# EAGLE board Professional 1.42 (EAGLE 7.7.0)
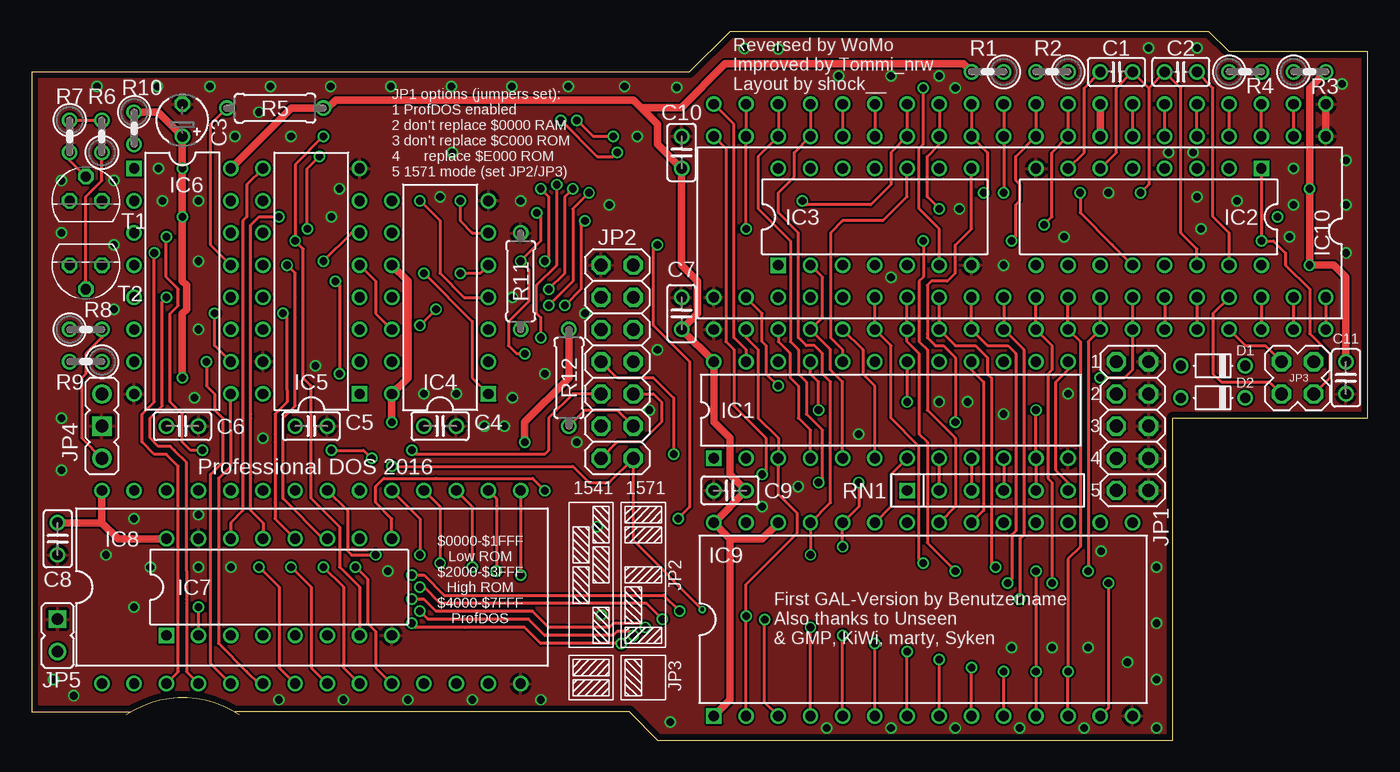
[diagram p0: board, top side]
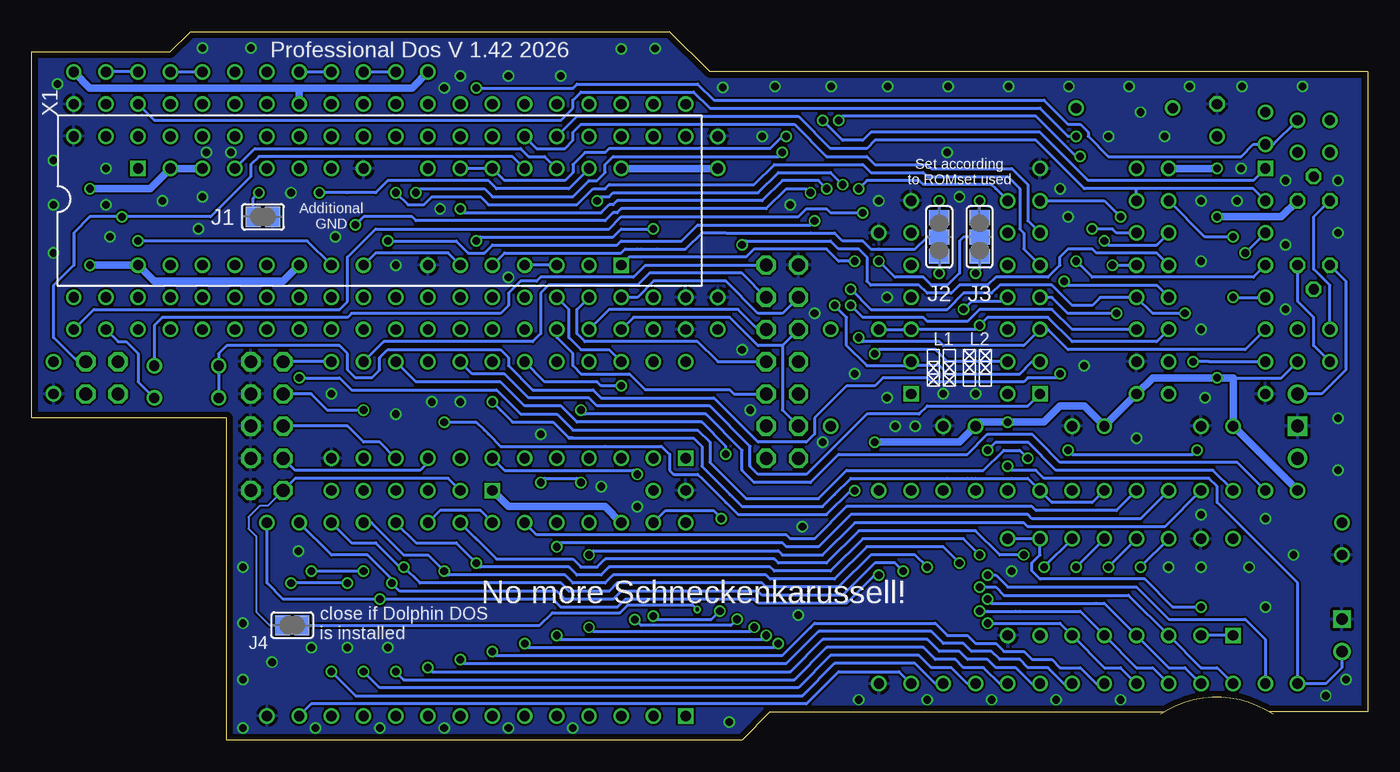
[diagram p1: board, bottom side, seen from below]

Size 105.37 x 55.88 mm. Coordinates in mm from the lower left corner, seen from the top.
Outline: 7.47,2.02 arc-68 16.36,2.02
Outline: 7.78,2.22 0,2.22 0,52.7 51.89,52.7 55.07,55.88 92.85,55.88 94.44,54.29 105.37,54.29 105.37,25.4 89.99,25.4 89.99,0 49.35,0 47.13,2.22 16.04,2.22
Copper layers (1*16): Top 0.035mm / dielectric 1.5mm / Bottom 0.035mm
Design rules "default *": minimum track width 6mil, minimum drill 0.3mm, track to track 6mil, track to pad 6mil, pad to pad 6mil, via to via 6mil, smd to smd 6mil, copper to edge 0.5mm, drill to drill 6mil, minimum pad ring 6mil, minimum via ring 6mil, stop-mask expansion 0.00126875mm, vias tented up to drill 0.31mm, thermal gap 10mil

## Footprints (pad centres in the part's own frame; a part is rotated, then mirrored left to right if it is on the bottom)
C025-025X050 = drill 0.813: 1 -1.27,0; 2 1.27,0
TT2D4 = drill 0.813: + -1.27,0 | drill 0.813 octagon: - 1.27,0
C2.5-2 = drill 0.813: 1 -1.27,0; 2 1.27,0
D-5 = drill 0.813: A 2.54,0; C -2.54,0
DIL24-3 = drill 0.813 square: 1 -13.97,-3.81 | drill 0.813: 2 -11.43,-3.81; 3 -8.89,-3.81; 4 -6.35,-3.81; 5 -3.81,-3.81; 6 -1.27,-3.81; 7 1.27,-3.81; 8 3.81,-3.81; 9 6.35,-3.81; 10 8.89,-3.81; 11 11.43,-3.81; 12 13.97,-3.81; 13 13.97,3.81; 14 11.43,3.81; 15 8.89,3.81; 16 6.35,3.81; 17 3.81,3.81; 18 1.27,3.81; 19 -1.27,3.81; 20 -3.81,3.81; 21 -6.35,3.81; 22 -8.89,3.81; 23 -11.43,3.81; 24 -13.97,3.81
DIL16 = drill 0.813 square: 1 -8.89,-3.81 | drill 0.813: 2 -6.35,-3.81; 3 -3.81,-3.81; 4 -1.27,-3.81; 5 1.27,-3.81; 6 3.81,-3.81; 7 6.35,-3.81; 8 8.89,-3.81; 9 8.89,3.81; 10 6.35,3.81; 11 3.81,3.81; 12 1.27,3.81; 13 -1.27,3.81; 14 -3.81,3.81; 15 -6.35,3.81; 16 -8.89,3.81
DIL14 = drill 0.813 square: 1 -7.62,-3.81 | drill 0.813: 2 -5.08,-3.81; 3 -2.54,-3.81; 4 0,-3.81; 5 2.54,-3.81; 6 5.08,-3.81; 7 7.62,-3.81; 8 7.62,3.81; 9 5.08,3.81; 10 2.54,3.81; 11 0,3.81; 12 -2.54,3.81; 13 -5.08,3.81; 14 -7.62,3.81
DIL28-6 = drill 0.813: 1 -16.51,-7.62; 2 -13.97,-7.62; 3 -11.43,-7.62; 4 -8.89,-7.62; 5 -6.35,-7.62; 6 -3.81,-7.62; 7 -1.27,-7.62; 8 1.27,-7.62; 9 3.81,-7.62; 10 6.35,-7.62; 11 8.89,-7.62; 12 11.43,-7.62; 13 13.97,-7.62; 14 16.51,-7.62; 15 16.51,7.62; 16 13.97,7.62; 17 11.43,7.62; 18 8.89,7.62; 19 6.35,7.62; 20 3.81,7.62; 21 1.27,7.62; 22 -1.27,7.62; 23 -3.81,7.62; 24 -6.35,7.62; 25 -8.89,7.62; 26 -11.43,7.62; 27 -13.97,7.62; 28 -16.51,7.62
DIL28-6' = drill 0.813 square: 1 -16.51,-7.62 | drill 0.813: 2 -13.97,-7.62; 3 -11.43,-7.62; 4 -8.89,-7.62; 5 -6.35,-7.62; 6 -3.81,-7.62; 7 -1.27,-7.62; 8 1.27,-7.62; 9 3.81,-7.62; 10 6.35,-7.62; 11 8.89,-7.62; 12 11.43,-7.62; 13 13.97,-7.62; 14 16.51,-7.62; 15 16.51,7.62; 16 13.97,7.62; 17 11.43,7.62; 18 8.89,7.62; 19 6.35,7.62; 20 3.81,7.62; 21 1.27,7.62; 22 -1.27,7.62; 23 -3.81,7.62; 24 -6.35,7.62; 25 -8.89,7.62; 26 -11.43,7.62; 27 -13.97,7.62; 28 -16.51,7.62
DIL40 = drill 0.813: 1 -24.13,-7.62; 2 -21.59,-7.62; 3 -19.05,-7.62; 4 -16.51,-7.62; 5 -13.97,-7.62; 6 -11.43,-7.62; 7 -8.89,-7.62; 8 -6.35,-7.62; 9 -3.81,-7.62; 10 -1.27,-7.62; 11 1.27,-7.62; 12 3.81,-7.62; 13 6.35,-7.62; 14 8.89,-7.62; 15 11.43,-7.62; 16 13.97,-7.62; 17 16.51,-7.62; 18 19.05,-7.62; 19 21.59,-7.62; 20 24.13,-7.62; 21 24.13,7.62; 22 21.59,7.62; 23 19.05,7.62; 24 16.51,7.62; 25 13.97,7.62; 26 11.43,7.62; 27 8.89,7.62; 28 6.35,7.62; 29 3.81,7.62; 30 1.27,7.62; 31 -1.27,7.62; 32 -3.81,7.62; 33 -6.35,7.62; 34 -8.89,7.62; 35 -11.43,7.62; 36 -13.97,7.62; 37 -16.51,7.62; 38 -19.05,7.62; 39 -21.59,7.62; 40 -24.13,7.62
SJ = smd 1.168 x 1.6: 1 -0.762,0; 2 0.762,0
SJ_2 = smd 1.168 x 1.6: 1 -1.524,0; 2 0,0; 3 1.524,0
2X05 = drill 1.016 octagon: 1 -5.08,-1.27; 2 -5.08,1.27; 3 -2.54,-1.27; 4 -2.54,1.27; 5 0,-1.27; 6 0,1.27; 7 2.54,-1.27; 8 2.54,1.27; 9 5.08,-1.27; 10 5.08,1.27
2X07 = drill 1.016 octagon: 1 -7.62,-1.27; 2 -7.62,1.27; 3 -5.08,-1.27; 4 -5.08,1.27; 5 -2.54,-1.27; 6 -2.54,1.27; 7 0,-1.27; 8 0,1.27; 9 2.54,-1.27; 10 2.54,1.27; 11 5.08,-1.27; 12 5.08,1.27; 13 7.62,-1.27; 14 7.62,1.27
2X02 = drill 1.016 octagon: 1 -1.27,-1.27; 2 -1.27,1.27; 3 1.27,-1.27; 4 1.27,1.27
1X03 = drill 1.016: 1 -2.54,0; 3 2.54,0 | drill 1.016 square: 2 0,0
JP1 = drill 0.914 square: 1 0,-1.27 | drill 0.914: 2 0,1.27
0207/2V = drill 0.813: 1 -1.27,0; 2 1.27,0
0207/7 = drill 0.813: 1 -3.81,0; 2 3.81,0
RN-6 = drill 0.813 square: 1 -6.35,0 | drill 0.813: 2 -3.81,0; 3 -1.27,0; 4 1.27,0; 5 3.81,0; 6 6.35,0
TO92 = drill 0.813 octagon: 1 1.27,0; 2 0,1.905; 3 -1.27,0
DIL40-BPLACE = drill 0.813: 1 -24.13,-7.62; 2 -21.59,-7.62; 3 -19.05,-7.62; 4 -16.51,-7.62; 5 -13.97,-7.62; 6 -11.43,-7.62; 7 -8.89,-7.62; 8 -6.35,-7.62; 9 -3.81,-7.62; 10 -1.27,-7.62; 11 1.27,-7.62; 12 3.81,-7.62; 13 6.35,-7.62; 14 8.89,-7.62; 15 11.43,-7.62; 16 13.97,-7.62; 17 16.51,-7.62; 18 19.05,-7.62; 19 21.59,-7.62; 20 24.13,-7.62; 21 24.13,7.62; 22 21.59,7.62; 23 19.05,7.62; 24 16.51,7.62; 25 13.97,7.62; 26 11.43,7.62; 27 8.89,7.62; 28 6.35,7.62; 29 3.81,7.62; 30 1.27,7.62; 31 -1.27,7.62; 32 -3.81,7.62; 33 -6.35,7.62; 34 -8.89,7.62; 35 -11.43,7.62; 36 -13.97,7.62; 37 -16.51,7.62; 38 -19.05,7.62; 39 -21.59,7.62; 40 -24.13,7.62

## Placement (x,y rotation side)
C1  56pF  [C025-025X050]  85.55,52.7 0 top
C2  56pF  [C025-025X050]  90.63,52.7 180 top
C3  10µF/16V  [TT2D4]  11.89,48.89 90 top
C4  100nf  [C2.5-2]  32.21,24.76 0 top
C5  100nf  [C2.5-2]  22.05,24.76 0 top
C6  100nf  [C2.5-2]  11.89,24.76 0 top
C7  100nf  [C2.5-2]  51.26,33.66 90 top
C8  100nf  [C2.5-2]  2.04,15.88 270 top
C9  100nf  [C2.5-2]  55.07,19.68 180 top
C10  100nf  [C2.5-2]  51.26,46.35 90 top
C11  100nf  [C2.5-2]  103.64,28.57 270 top
D1  1N4148  [D-5]  93.17,29.53 180 top
D2  1N4148  [D-5]  93.17,26.99 180 top
IC1  GAL 22V10  [DIL24-3]  67.77,26.04 0 top
IC2  74LS123N  [DIL16]  88.09,41.27 180 top
IC3  74LS00N  [DIL14]  66.5,41.27 0 top
IC4  74LS74N  [DIL14]  32.21,34.92 90 top
IC5  74LS157N  [DIL16]  22.05,36.2 90 top
IC6  74LS367N  [DIL16]  11.89,36.2 270 top
IC7  74LS173N  [DIL16]  19.51,12.06 0 top
IC8  EPROM  [DIL28-6]  22.05,12.06 0 top
IC9  SRAM  [DIL28-6']  70.31,9.53 0 top
IC10  CPU 6502  [DIL40]  77.93,40 180 top
J1  1  [SJ]  87.13,41.27 0 bottom
J2  Alternativ connection for old version  [SJ_2]  33.79,39.69 90 bottom
J3  Alternativ connection for old version  [SJ_2]  30.62,39.69 90 bottom
J4  1  [SJ]  84.82,9.06 180 bottom
JP1  Options  [2X05]  86.82,24.76 270 top
JP2  1  [2X07]  46.18,29.84 270 top
JP3  1  [2X02]  99.83,28.57 0 top
JP4  DUO LED 2V/20mA  [1X03]  5.54,24.76 270 top
JP5  ROMSW  [JP1]  2.04,8.26 180 top
R1  1K5  [0207/2V]  75.39,52.7 180 top
R2  9K1  [0207/2V]  80.47,52.7 180 top
R3  1K5  [0207/2V]  100.79,52.7 0 top
R4  9K1  [0207/2V]  95.71,52.7 0 top
R5  1K8  [0207/7]  19.19,49.85 0 top
R6  30k  [0207/2V]  5.54,47.62 90 top
R7  30k  [0207/2V]  3,47.62 270 top
R8  300  [0207/2V]  4.27,32.38 0 top
R9  300  [0207/2V]  4.27,29.84 180 top
R10  4k7  [0207/2V]  8.08,48.26 270 top
R11  1K8  [0207/7]  38.56,36.2 270 top
R12  4k7  [0207/7]  42.37,28.57 90 top
RN1  4k7  [RN-6]  75.39,19.68 0 top
T1  BC557  [TO92]  4.27,42.55 0 top
T2  BC547  [TO92]  4.27,37.46 180 top
X1  DIL40-Adaptor  [DIL40-BPLACE]  77.93,42.55 180 top

## Library data of the parts
C1-C3 R1-R12 = rcl
C4-C11 = capacitor-wima
D1 D2 = diode
IC1 = pal; MPN: GAL22V10D-7LPN; OC_FARNELL: 1571925; OC_NEWARK: 97M0480
IC2-IC7 = 74xx-eu
IC8 = microchip; OC_FARNELL: unknown; OC_NEWARK: unknown
IC9 = memory-hitachi; OC_FARNELL: 283605; OC_NEWARK: unknown
IC10 X1 = csg65xxx
J1-J4 JP5 = jumper
JP1 JP3 JP4 = pinhead
JP2 = pinhead_eckig
RN1 = resistor-net
T1 T2 = transistor

## Nets
2MHZ(D1): D1.C JP2.2
2MHZ/A13-EXT: IC1.14 JP2.4
/EN-A[4..7]->AH: IC1.20 IC3.9 IC3.10 IC6.1
/IRQ: IC10.4 X1.4
/NMI: IC10.6 X1.6
/Q: IC4.6 J2.3
/RES: IC4.13 IC10.40 J3.2 X1.40
A0: IC5.14 IC10.9 X1.9
A1: IC4.2 IC5.2 IC10.10 X1.10
A2: IC4.12 IC5.5 IC10.11 X1.11
A3: IC5.11 IC10.12 X1.12
A4: IC5.13 IC6.10 IC10.13 X1.13
A5: IC5.3 IC6.6 IC10.14 X1.14
A6: IC5.6 IC6.4 IC10.15 X1.15
A7: IC5.10 IC6.2 IC10.16 X1.16
A8: IC8.25 IC9.25 IC10.17 X1.17
A9: IC8.24 IC9.24 IC10.18 X1.18
A10: IC8.21 IC9.21 IC10.19 X1.19
A11: IC1.7 IC8.23 IC9.23 IC10.20
A11-EXT: IC1.23 X1.20
A12: IC1.3 IC8.2 IC9.2 IC10.22
A12-EXT: IC1.19 X1.22
A13: IC1.4 IC10.23 JP2.5 JP2.11
A13-EXT: JP2.3 X1.23
A14: IC1.5 IC3.2 IC10.24 JP2.6
A14-EXT: JP2.8 X1.24
A15: IC1.6 IC10.25 JP2.10 JP2.13
A15-EXT: IC1.22 X1.25
AH4: IC6.9 IC7.6 IC8.6 IC9.6
AH5: IC6.7 IC7.5 IC8.5 IC9.5
AH6: IC6.5 IC7.4 IC8.4 IC9.4
AH7: IC6.3 IC7.3 IC8.3 IC9.3
AL0: IC5.12 IC7.11 IC8.10 IC9.10
AL1: IC5.4 IC7.12 IC8.9 IC9.9
AL2: IC5.7 IC7.13 IC8.8 IC9.8
AL3: IC5.9 IC7.14 IC8.7 IC9.7
CLR: IC4.1 J3.1
D0: IC8.11 IC9.11 IC10.33 X1.33
D1: IC8.12 IC9.12 IC10.32 X1.32
D2: IC8.13 IC9.13 IC10.31 X1.31
D3: IC8.15 IC9.15 IC10.30 X1.30
D4: IC8.16 IC9.16 IC10.29 X1.29
D5: IC8.17 IC9.17 IC10.28 X1.28
D6: IC8.18 IC9.18 IC10.27 X1.27
D7: IC8.19 IC9.19 IC10.26 X1.26
EN-2MHZ: IC2.9 IC3.6 R6.2 R7.1 R10.2
EN-A[4..7]->AH: IC3.8 IC7.1 IC7.2 IC7.9 IC7.10
EPROM_A13: IC8.26 JP2.9
EPROM_A13/A14-EXT: IC1.15 JP2.7
EPROM_A14: IC1.21 IC8.27
EPROM_A15: IC8.1 J4.1 JP2.14 JP5.2
FETCH_CLOCK_MODE: D1.A D2.A IC6.12
GND: C3.- C4.2 C5.2 C6.2 C7.2 C8.2 C9.2 C10.2 C11.2 IC1.12 IC2.8 IC3.7 IC4.7 IC5.8 IC5.15 IC6.8 IC7.8 IC7.15 IC8.14 IC9.14 IC10.1 IC10.21 J1.2 JP1.2 JP1.4 JP1.6 JP1.8 JP1.10 JP2.1 JP4.2 JP5.1 R11.1 X1.1 X1.21
N$1: R3.1 R4.2
N$2: C1.2 C2.2 IC2.6 IC2.14 J1.1
N$3: C2.1 IC2.15 R4.1
N$4: C1.1 IC2.7 R2.1
N$5: R1.1 R2.2
N$6: IC2.4 IC3.12
N$7: R7.2 T1.2
N$8: IC2.12 IC3.13
N$9: IC3.5 J2.2
N$10: R6.1 T2.2
N$11: IC3.3 IC3.4
N$12: IC3.1 IC4.8
N$13: JP4.1 T2.1
N$14: R9.2 T2.3
N$21: JP4.3 R8.2
N$22: R8.1 T1.3
NC0: IC10.5 X1.5
NC1: IC10.35 X1.35
NC2: IC10.36 X1.36
ON-OFF: IC1.13 JP1.1 RN1.6
OPT2: IC1.11 JP1.3 RN1.5
OPT3: IC1.10 JP1.5 RN1.4
OPT4: IC1.9 JP1.7 RN1.3
OPT5: IC1.8 J4.2 JP1.9 RN1.2
PHI1: IC6.14 IC7.7 IC10.3 X1.3
PHI2: D2.C IC10.39 X1.39
PHI2-IN: IC3.11 JP3.4
PHI2-IN_OUT: IC10.37 JP3.2
PHI2-INPUT: JP3.1 X1.37
PHI2-INPUT_OUT: IC2.1 IC2.10 JP3.3
PRE: IC4.4 J3.3
PULLUP: JP2.12 R12.1
Q: IC4.5 J2.1
R/W: IC6.15 IC10.34 X1.34
R/W-RAM: IC6.13 IC9.27 R5.1
RAM-/CS1: IC1.16 IC9.20 IC9.22
RDY: IC10.2 X1.2
ROM-/CE: IC1.18 IC8.20 IC8.22
SELECT-A[0..3|4..7]->AL: IC1.17 IC5.1
SET-CLOCK-MODE: IC4.3 IC4.11 IC6.11 R11.2
SOB: IC10.38 X1.38
SYNC: IC10.7 X1.7
VCC: C3.+ C4.1 C5.1 C6.1 C7.1 C8.1 C9.1 C10.1 C11.1 IC1.24 IC2.2 IC2.3 IC2.11 IC2.16 IC3.14 IC4.10 IC4.14 IC5.16 IC6.16 IC7.16 IC8.28 IC9.1 IC9.26 IC9.28 IC10.8 R1.2 R3.2 R5.2 R9.1 R10.1 R12.2 RN1.1 T1.1 X1.8

## Tracks (layer width: path | path; a pad name or v marks a point on that pad's centre or on a via)
2MHZ(D1)
  Bottom 0.254: JP2.2 56.97,37.46 57.92,36.51 65.23,36.51 65.54,36.2 66.81,36.2 67.77,35.24 67.77,34.29 68.4,33.66 80.15,33.66 80.47,33.34 95.07,33.34 95.71,32.7 D1.C
2MHZ/A13-EXT
  Bottom 0.254: IC1.14 77.61,31.43 65.86,31.43 65.23,32.07 65.23,35.24 64.59,35.88 57.61,35.88 56.65,36.83 49.35,36.83 JP2.4
/EN-A[4..7]->AH  (via drill 0.6)
  Top 0.254: IC3.10 69.04,42.86 67.13,40.96 63.96,40.96 63,40 63,31.75 63.96,30.8 IC1.20 | v43,48.89 44.27,47.63 v45.86,47.63
  Bottom 0.254: IC3.9 IC3.10 68.08,44.13 63.32,44.13 62.69,44.77 62.69,45.4 61.73,46.35 60.15,46.35 59.83,46.67 47.13,46.67 46.18,47.63 v45.86,47.63 | IC6.1 9.03,44.13 22.05,44.13 25.86,47.94 39.19,47.94 39.83,47.31 41.41,47.31 v43,48.89
/IRQ
  Top 0.254: IC10.4 X1.4
/NMI
  Top 0.254: IC10.6 X1.6
/Q  (via drill 0.6)
  Top 0.254: v33.79,42.55 33.79,40.96 34.75,40 IC4.6
  Bottom 0.254: J2.3 v33.79,42.55
/RES  (via drill 0.6)
  Top 0.254: X1.40 IC10.40 | v39.83,41.59 40.14,41.28 40.14,39.37 v38.56,37.78 39.19,37.15 39.19,34.61 37.6,33.02 37.6,31.11 38.24,30.48 v38.87,30.48
  Bottom 0.254: IC4.13 33.16,29.85 34.11,30.8 38.56,30.8 v38.87,30.48 | J3.2 31.89,39.69 32.21,39.37 32.21,36.83 33.16,35.88 34.43,35.88 35.06,36.51 37.29,36.51 v38.56,37.78 | IC10.40 100.47,33.97 81.1,33.97 80.47,34.61 80.47,38.1 78.24,40.32 59.83,40.32 58.88,41.28 44.91,41.28 44.27,41.91 42.68,41.91 42.37,41.59 v39.83,41.59
A0  (via drill 0.6)
  Top 0.254: X1.9 IC10.9 80.47,46.35 80.47,41.28 v79.83,40.64 | v43.95,43.18 42.68,41.91 42.68,36.2 v40.78,34.29
  Bottom 0.254: IC5.14 23.32,32.38 24.9,33.97 30.62,33.97 31.57,33.02 34.75,33.02 35.06,33.34 39.83,33.34 v40.78,34.29 | v43.95,43.18 44.27,43.5 45.86,43.5 47.45,41.91 58.88,41.91 59.19,41.59 59.51,41.59 60.15,40.96 75.07,40.96 75.39,41.28 79.2,41.28 v79.83,40.64
A1  (via drill 0.6)
  Top 0.254: X1.10 IC10.10 77.61,46.04 77.61,44.13 77.93,43.81 77.93,42.55 77.61,42.23 77.61,39.69 v77.29,39.37 | v43.64,40.96 43.32,40.64 43.32,35.56 v42.05,34.29
  Bottom 0.254: IC5.2 26.49,29.85 27.44,28.89 33.16,28.89 33.79,29.53 35.7,29.53 IC4.2 36.33,29.53 39.51,29.53 41.1,31.11 41.1,33.34 v42.05,34.29 | v77.29,39.37 71.89,39.37 70.94,38.42 69.67,38.42 69.04,39.05 59.19,39.05 58.88,39.37 54.11,39.37 52.84,40.64 43.95,40.64 v43.64,40.96
A2  (via drill 0.6)
  Top 0.254: X1.11 IC10.11 v76.66,43.18 | IC5.5 27.13,36.2 27.13,33.66 IC4.12
  Bottom 0.254: v76.66,43.18 75.7,42.23 74.43,42.23 73.8,42.86 69.99,42.86 69.35,42.23 62.37,42.23 61.1,43.5 60.15,43.5 59.83,43.81 48.4,43.81 46.81,45.4 39.83,45.4 39.19,44.77 35.06,44.77 34.75,44.45 28.4,44.45 27.44,43.5 27.44,40.32 27.13,40 27.13,38.74 IC5.5
A3  (via drill 0.6)
  Top 0.254: X1.12 IC10.12 75.39,46.35 75.39,43.5 v75.07,43.18 | v21.73,40.32 21.73,45.09 v22.68,46.04 | v41.73,48.89 44.59,46.04 45.86,46.04 v46.18,46.35
  Bottom 0.254: v75.07,43.18 74.75,43.5 69.67,43.5 69.04,42.86 62.69,42.86 61.42,44.13 60.78,44.13 60.15,44.77 60.15,45.4 59.51,46.04 46.49,46.04 v46.18,46.35 | IC5.11 19.82,40 20.14,40.32 v21.73,40.32 | v41.73,48.89 41.41,49.21 26.17,49.21 23,46.04 v22.68,46.04
A4  (via drill 0.6)
  Top 0.254: X1.13 IC10.13 71.58,46.99 70.62,46.04 70.62,42.86 v71.58,41.91 | IC6.10 14.43,31.11 v14.43,33.66 | v40.78,35.56 42.05,36.83 42.05,42.86 v42.68,43.5
  Bottom 0.254: v14.43,33.66 16.97,33.66 IC5.13 21.09,34.92 21.73,34.29 23.32,34.29 24.9,35.88 29.03,35.88 29.67,35.24 31.89,35.24 33.16,33.97 39.19,33.97 v40.78,35.56 | v71.58,41.91 71.26,41.59 60.46,41.59 59.83,42.23 59.51,42.23 59.19,42.55 47.76,42.55 46.18,44.13 43.32,44.13 v42.68,43.5
A5  (via drill 0.6)
  Top 0.254: X1.14 IC10.14 67.77,46.35 67.77,43.81 66.18,42.23 61.1,42.23 v60.78,42.55 | 41.41,44.13 v41.41,43.81 41.41,37.46 39.83,35.88 39.83,33.66 40.14,33.34 v40.14,31.75
  Bottom 0.254: IC6.6 9.66,30.8 23.63,30.8 25.22,32.38 IC5.3 27.13,31.11 33.48,31.11 33.79,31.43 39.83,31.43 v40.14,31.75 | v60.78,42.55 60.46,42.86 59.83,42.86 59.51,43.18 48.08,43.18 46.49,44.77 42.37,44.77 v41.41,43.81
A6  (via drill 0.6)
  Top 0.254: X1.15 IC10.15 | IC5.6 25.22,40 v23,37.78
  Bottom 0.254: IC6.4 9.03,36.51 21.73,36.51 v23,37.78 | IC10.15 65.54,46.67 63.32,46.67 62.69,47.31 62.69,47.94 62.05,48.58 45.22,48.58 42.68,46.04 39.51,46.04 38.87,45.4 34.75,45.4 34.43,45.09 28.08,45.09 26.81,43.81 26.81,40.96 IC5.6
A7
  Top 0.254: X1.16 IC10.16
  Bottom 0.254: IC6.2 9.03,43.5 18.24,43.5 | IC5.10 18.24,43.5 | 18.24,43.5 22.36,43.5 26.17,47.31 38.87,47.31 39.51,46.67 42.37,46.67 44.91,49.21 62.37,49.21 IC10.16
A8  (via drill 0.6)
  Top 0.254: X1.17 IC10.17 60.15,46.35 60.15,44.45 58.88,43.18 58.88,41.59 60.46,40 60.46,31.75 61.1,31.11 61.73,31.11 62.37,30.48 62.37,28.89 63,28.26 63,18.73 IC9.25 v61.42,14.61
  Bottom 0.254: IC8.25 16.01,16.83 26.81,16.83 27.13,17.14 40.46,17.14 43,14.61 46.18,14.61 46.49,14.92 61.1,14.92 v61.42,14.61
A9  (via drill 0.6)
  Top 0.254: X1.18 IC10.18 57.29,46.04 57.29,41.91 59.83,39.37 59.83,31.43 60.46,30.8 60.46,28.89 61.1,28.26 61.1,25.72 62.37,24.45 62.37,20.64 v62.05,20.32 | v65.23,20.32 65.23,18.42 IC9.24 v63.96,15.24
  Bottom 0.254: v65.23,20.32 64.91,20.64 62.37,20.64 v62.05,20.32 | IC8.24 17.92,17.46 26.49,17.46 26.81,17.78 40.78,17.78 43.32,15.24 45.86,15.24 46.18,15.56 63.64,15.56 v63.96,15.24
A10  (via drill 0.6)
  Top 0.254: X1.19 IC10.19 v56.34,40.32 | IC9.21 72.85,18.42 72.85,23.81 70.62,26.04 70.62,30.8 69.99,31.43 69.99,36.2 70.31,36.51 v70.31,39.37 | IC8.21 24.9,18.1 24.9,14.92 25.22,14.61 v27.13,14.61
  Bottom 0.254: v27.13,14.61 29.03,14.61 30.94,16.51 40.14,16.51 42.68,13.97 46.49,13.97 46.81,14.29 60.15,14.29 60.78,13.65 62.05,13.65 62.69,14.29 68.72,14.29 IC9.21 69.35,14.92 | v56.34,40.32 58.88,40.32 59.51,39.69 69.99,39.69 v70.31,39.37
A11  (via drill 0.6)
  Top 0.254: IC10.20 54.75,46.67 54.75,31.43 55.38,30.8 55.38,26.35 57.92,23.81 57.92,21.27 v57.61,20.95 | IC9.23 67.77,18.42 67.77,20.95 IC1.7
  Bottom 0.254: IC8.23 19.82,18.1 26.17,18.1 26.49,18.42 41.1,18.42 43.64,15.87 45.54,15.87 45.86,16.19 65.54,16.19 IC9.23 | IC1.7 68.08,21.27 57.92,21.27 v57.61,20.95
A11-EXT
  Top 0.254: X1.20 55.38,48.58 55.38,31.75 56.34,30.8 IC1.23
A12  (via drill 0.6)
  Top 0.254: v51.09,10.19 49.85,11.43 32.52,11.43 30.94,13.02 v29.98,13.02 | IC10.22 56.34,31.75 57.29,30.8 57.29,25.4 58.88,23.81 IC1.3 58.88,19.38 60.34,17.92 60.34,16.28 56.34,12.28 v56.34,9.78 IC9.2
  Bottom 0.254: v29.98,13.02 29.35,13.02 28.4,12.06 18.24,12.06 15.7,9.53 9.66,9.53 8.08,7.94 IC8.2 | v51.09,10.19 51.79,9.49 56.04,9.49 v56.34,9.78
A12-EXT  (via drill 0.6)
  Top 0.254: X1.22 57.61,33.66 57.61,31.43 57.92,31.11 57.92,28.89 v58.88,27.94
  Bottom 0.254: v58.88,27.94 60.46,27.94 60.78,28.26 64.91,28.26 IC1.19
A13
  Top 0.254: IC10.23 58.88,31.43 59.83,30.48 59.83,28.58 60.46,27.94 60.46,25.4 61.42,24.45 IC1.4
  Bottom 0.254: 46.18,31.11 48.08,31.11 50.3,33.34 57.92,33.34 IC10.23 | JP2.5 46.18,31.11 | 46.18,31.11 46.18,26.04 JP2.11
A13-EXT
  Bottom 0.254: X1.23 57.61,34.92 56.34,36.2 50.62,36.2 48.08,33.66 46.18,33.66 JP2.3
A14
  Top 0.254: IC1.5 63.96,28.26 63,29.21 63,30.8 IC10.24 62.37,33.34 62.37,36.51 IC3.2
  Bottom 0.254: IC10.24 59.83,33.97 49.67,33.97 48.08,32.38 JP2.6
A14-EXT
  Bottom 0.254: X1.24 62.37,33.97 62.37,32.07 61.73,31.43 52.84,31.43 51.26,29.85 JP2.8
A15
  Top 0.254: IC1.6 66.5,27.94 65.54,28.89 65.54,30.8 IC10.25 | JP2.10 49.03,27.31 49.67,26.67 49.67,25.08 48.08,23.49 46.18,23.49 JP2.13
  Bottom 0.254: IC10.25 63.96,31.75 62.69,30.48 62.69,29.53 62.05,28.89 58.24,28.89 56.97,27.62 50.3,27.62 49.99,27.31 JP2.10
A15-EXT
  Bottom 0.254: X1.25 63,33.97 63,31.75 62.05,30.8 59.83,30.8 IC1.22
AH4  (via drill 0.6)
  Top 0.254: IC9.6 v66.5,7.62 | IC8.6 17.92,4.44 16.97,5.4 14.74,7.62 14.74,20.64 15.7,21.59 15.7,24.45 IC6.9 | v46.49,7.62 40.14,7.62 39.83,7.94 38.87,8.89 34.11,8.89 30.3,8.89 v29.98,9.21
  Bottom 0.254: v66.5,7.62 66.18,7.3 46.81,7.3 v46.49,7.62 | v29.98,9.21 29.67,9.21 24.27,9.21 | 24.27,9.21 IC7.6 | 24.27,9.21 IC7.6 | IC7.6 20.78,5.72 19.51,5.72 IC8.6
AH5  (via drill 0.6)
  Top 0.254: IC9.5 v63.96,8.26 | v13.79,29.85 13.79,27.94 14.43,27.31 14.43,26.04 15.06,25.4 15.06,23.49 15.06,21.91 14.11,20.95 14.11,6.03 14.43,5.72 IC8.5 | v47.45,8.26 47.13,8.57 46.18,8.57 45.86,8.26 40.46,8.26 39.19,9.53 34.11,9.53 31.25,9.53 v30.62,10.16
  Bottom 0.254: v63.96,8.26 63.64,7.94 47.76,7.94 v47.45,8.26 | v30.62,10.16 29.98,10.16 27.76,10.16 27.44,10.16 22.68,10.16 | 22.68,10.16 IC7.5 | 22.68,10.16 IC7.5 | IC6.7 11.25,29.85 12.52,29.85 v13.79,29.85 | IC7.5 18.24,5.72 16.97,5.72 IC8.5
AH6  (via drill 0.6)
  Top 0.254: IC9.4 v61.42,8.89 | v10.62,34.92 10.3,34.61 10.3,26.35 9.35,25.4 9.35,23.81 9.98,23.18 10.93,23.18 11.25,22.86 12.2,21.91 12.2,13.34 12.2,11.11 12.2,10.79 12.2,5.4 IC8.4 | v48.4,8.89 48.08,9.21 45.86,9.21 45.54,8.89 40.78,8.89 39.51,10.16 34.11,10.16 31.89,10.16 30.94,11.11 v29.98,11.11
  Bottom 0.254: v61.42,8.89 61.1,8.57 48.72,8.57 v48.4,8.89 | v29.98,11.11 29.67,10.79 21.41,10.79 20.78,10.79 | 20.78,10.79 IC7.4 | 20.78,10.79 IC7.4 | v10.62,34.92 IC6.5 | IC7.4 15.7,5.72 14.43,5.72 IC8.4
AH7  (via drill 0.6)
  Top 0.254: v9.66,38.42 9.66,26.67 8.71,25.72 8.71,23.49 9.66,22.54 10.62,22.54 11.57,21.59 11.57,5.4 IC8.3 | v30.62,12.06 30.94,12.06 32.21,10.79 48.48,10.79 v49.75,9.53 | IC9.3 57.8,2.98 v57.8,9.51
  Bottom 0.254: v30.62,12.06 29.35,12.06 28.71,11.43 18.87,11.43 IC7.3 13.16,5.72 11.89,5.72 IC8.3 | IC6.3 v9.66,38.42 | v49.75,9.53 50.24,9.03 57.31,9.03 v57.8,9.51
AL0  (via drill 0.6)
  Top 0.254: IC8.10 27.13,5.72 27.13,8.57 26.49,9.21 26.49,12.7 v25.54,13.65 | IC9.10 v76.66,5.4 | v20.14,37.46 20.78,36.83 20.78,34.92 20.78,33.34 20.78,26.35 19.82,25.4 19.82,24.45 19.82,23.81 19.82,19.05 23,15.87 IC7.11
  Bottom 0.254: v76.66,5.4 76.02,4.76 45.22,4.76 42.68,7.3 35.06,7.3 34.11,6.35 32.52,6.35 31.89,5.72 30.3,5.72 29.03,4.44 IC8.10 | IC7.11 v25.54,13.65 | v20.14,37.46 IC5.12
AL1  (via drill 0.6)
  Top 0.254: v23,13.65 24.59,12.06 24.59,6.03 24.59,5.72 IC8.9 | IC9.9 v74.12,5.72 | v19.82,33.66 20.14,33.34 20.14,27.62 20.14,26.67 19.19,25.72 19.19,24.13 19.19,23.49 19.19,18.73 19.19,17.46 19.51,17.14 IC7.12
  Bottom 0.254: v74.12,5.72 73.8,5.4 45.54,5.4 43,7.94 34.75,7.94 33.79,6.98 32.21,6.98 31.57,6.35 29.98,6.35 29.35,5.72 27.76,5.72 26.49,4.44 IC8.9 | v19.82,33.66 23.63,33.66 24.9,34.92 IC5.4 | v23,13.65 IC7.12
AL2  (via drill 0.6)
  Top 0.254: v20.46,13.65 22.05,12.06 22.05,5.72 IC8.8 | IC9.8 v71.58,6.35 | v19.51,41.28 17.92,41.28 17.28,40.64 17.28,25.72 17.28,25.4 17.28,20.95 17.28,20.64 17.28,18.1 18.24,17.14 IC7.13
  Bottom 0.254: IC7.13 v20.46,13.65 | v71.58,6.35 71.26,6.03 45.86,6.03 43.32,8.57 34.43,8.57 33.48,7.62 31.89,7.62 31.25,6.98 29.67,6.98 29.03,6.35 27.44,6.35 26.81,5.72 25.22,5.72 23.95,4.44 IC8.8 | IC5.7 20.78,42.55 v19.51,41.28
AL3  (via drill 0.6)
  Top 0.254: v17.92,13.65 19.51,12.06 19.51,5.72 IC8.7 | IC9.7 v69.04,6.98 | IC5.9 16.97,43.81 16.97,41.28 16.65,40.96 16.65,18.1 15.7,17.14 IC7.14
  Bottom 0.254: IC7.14 v17.92,13.65 | v69.04,6.98 68.72,6.67 46.18,6.67 43.95,8.89 43.64,9.21 34.11,9.21 33.16,8.26 31.57,8.26 30.94,7.62 29.35,7.62 28.71,6.98 27.13,6.98 26.49,6.35 24.9,6.35 24.27,5.72 22.68,5.72 21.41,4.44 IC8.7
CLR  (via drill 0.6)
  Top 0.254: v30.94,36.83 34.75,33.02 34.75,28.58 IC4.1
  Bottom 0.254: J3.1 30.62,37.15 v30.94,36.83
D0  (via drill 0.6)
  Top 0.254: X1.33 IC10.33 83.32,31.43 v83.32,13.34 | v79.2,13.34 v79.2,5.4 IC9.11
  Bottom 0.254: v83.32,13.34 v79.2,13.34 | IC8.11 31.57,4.44 32.84,5.72 34.43,5.72 35.38,6.67 42.37,6.67 44.91,4.13 77.93,4.13 v79.2,5.4
D1  (via drill 0.6)
  Top 0.254: X1.32 IC10.32 82.69,31.43 82.69,15.24 81.74,14.29 v81.74,5.4 IC9.12
  Bottom 0.254: v81.74,5.4 79.83,3.49 44.59,3.49 42.05,6.03 35.7,6.03 34.11,4.44 IC8.12
D2  (via drill 0.6)
  Top 0.254: X1.31 IC10.31 80.47,31.11 80.47,29.21 80.15,28.89 80.15,20.64 80.47,20.32 v80.47,12.38 | v84.91,12.38 84.91,2.54 IC9.13
  Bottom 0.254: v80.47,12.38 v84.91,12.38 | IC9.13 83.32,2.86 44.27,2.86 41.73,5.4 36.97,5.4 IC8.13
D3  (via drill 0.6)
  Top 0.254: X1.30 IC10.30 78.24,30.8 78.24,16.19 77.93,15.87 v77.93,11.11 | IC8.15 v38.56,13.02
  Bottom 0.254: IC9.15 86.82,12.38 85.55,11.11 v77.93,11.11 64.27,11.11 63.64,10.48 59.19,10.48 58.56,11.11 48.4,11.11 48.08,10.79 41.1,10.79 38.87,13.02 v38.56,13.02
D4  (via drill 0.6)
  Top 0.254: X1.29 IC10.29 75.39,31.11 76.97,31.11 77.61,30.48 77.61,16.51 77.29,16.19 77.29,12.7 v76.97,12.38 | IC8.16 36.65,19.05 v36.65,13.34
  Bottom 0.254: v36.65,13.34 37.29,13.97 38.87,13.97 41.41,11.43 47.76,11.43 48.08,11.75 58.88,11.75 59.51,11.11 63.32,11.11 63.96,11.75 76.34,11.75 v76.97,12.38 76.97,12.7 78.88,14.61 81.74,14.61 IC9.16
D5  (via drill 0.6)
  Top 0.254: X1.28 IC10.28 72.85,31.11 74.43,31.11 75.39,30.16 75.39,28.89 75.7,28.58 75.7,13.97 v76.02,13.65 | IC8.17 34.75,18.42 v34.75,13.65
  Bottom 0.254: v34.75,13.65 35.7,14.61 39.19,14.61 41.73,12.06 47.45,12.06 47.76,12.38 59.19,12.38 59.83,11.75 63,11.75 63.64,12.38 74.75,12.38 v76.02,13.65 76.34,13.65 78.24,15.56 80.15,15.56 IC9.17
D6  (via drill 0.6)
  Top 0.254: X1.27 IC10.27 69.04,31.43 69.99,30.48 69.99,24.13 70.62,23.49 70.62,15.56 v72.85,13.34 | IC8.18 32.21,18.42 v32.21,13.97
  Bottom 0.254: v32.21,13.97 33.48,15.24 39.51,15.24 42.05,12.7 47.13,12.7 47.45,13.02 59.51,13.02 60.15,12.38 62.69,12.38 63.32,13.02 72.53,13.02 v72.85,13.34 74.12,14.61 76.02,14.61 78.56,17.14 IC9.18
D7  (via drill 0.6)
  Top 0.254: X1.26 IC10.26 67.77,31.11 67.77,25.4 69.99,23.18 69.99,14.29 v70.31,13.97 | IC8.19 30.62,17.46 v30.62,14.61
  Bottom 0.254: v30.62,14.61 31.89,15.87 39.83,15.87 42.37,13.34 46.81,13.34 47.13,13.65 59.83,13.65 60.46,13.02 62.37,13.02 63,13.65 69.99,13.65 v70.31,13.97 71.89,15.56 75.07,15.56 IC9.19
EN-2MHZ  (via drill 0.6)
  Top 0.254: IC3.6 71.58,40.32 69.99,41.91 69.99,46.67 70.31,46.99 v70.31,51.43 | R7.1 R6.2
  Bottom 0.254: IC3.6 72.53,38.42 78.24,38.42 IC2.9 | v70.31,51.43 62.69,51.43 62.37,51.75 52.84,51.75 51.57,50.48 25.54,50.48 23.63,48.58 22.68,48.58 22.05,47.94 22.05,47.63 20.46,46.04 9.98,46.04 9.03,46.99 R10.2 7.44,46.99 R6.2
EN-A[4..7]->AH  (via drill 0.6)
  Top 0.254: IC7.9 28.4,17.46 27.13,18.73 27.13,20 27.76,20.64 31.89,20.64 39.51,20.64 v40.46,19.69 | IC7.2 v13.16,10.48 | v72.85,25.08 72.85,30.16 71.89,31.11 71.26,31.11 70.62,31.75 70.62,32.07 70.62,35.88 70.94,36.2 72.21,36.2 72.85,36.83 72.85,39.05 73.48,39.69 74.12,40.32 IC3.8
  Bottom 0.254: IC7.9 IC7.10 25.86,14.61 26.49,13.97 26.49,13.34 25.86,12.7 17.6,12.7 15.38,10.48 v13.16,10.48 | IC7.1 IC7.2 | v72.85,25.08 70.31,25.08 69.67,24.45 69.35,24.13 68.4,23.18 60.15,23.18 55.7,23.18 55.07,22.54 55.07,21.27 54.75,20.95 52.84,20.95 52.53,20.64 50.62,18.73 49.67,17.78 42.68,17.78 40.78,19.69 v40.46,19.69
EPROM_A13  (via drill 0.6)
  Top 0.254: JP2.9 42.68,27.31 40.78,25.4 40.78,22.86 40.46,22.54 30.3,22.54 v29.98,22.86
  Bottom 0.254: IC8.26 12.2,21.27 24.59,21.27 26.81,23.49 29.35,23.49 v29.98,22.86
EPROM_A13/A14-EXT  (via drill 0.6)
  Top 0.254: JP2.7 46.18,28.58 49.03,28.58 50.62,26.99 v50.62,22.54
  Bottom 0.254: v50.62,22.54 50.62,23.18 52.53,25.08 62.37,25.08 63.64,26.35 66.5,26.35 68.4,28.26 75.07,28.26 IC1.15
EPROM_A14  (via drill 0.6)
  Top 0.254: v62.05,26.04 62.05,28.26 61.42,28.89 IC1.21
  Bottom 0.254: IC8.27 10.3,21.91 24.27,21.91 25.86,23.49 26.49,24.13 29.98,24.13 31.57,22.54 41.73,22.54 43.95,20.32 48.4,20.32 49.35,21.27 49.35,22.86 52.21,25.72 61.73,25.72 v62.05,26.04
EPROM_A15  (via drill 0.3, 0.6)
  Top 0.254: v28.4,21.59 42.68,21.59 43.95,20.32 45.54,20.32 JP2.14 47.45,15.74 v52.88,10.3
  Bottom 0.254: JP5.2 2.04,5.72 3.31,4.44 IC8.1 5.54,12.38 11.89,18.73 11.89,20 12.52,20.64 25.54,20.64 26.17,21.27 28.08,21.27 v28.4,21.59 | J4.1 65.3,9.06 64.31,10.05 58.99,10.05 58.36,10.68 53.26,10.68 v52.88,10.3
FETCH_CLOCK_MODE  (via drill 0.6)
  Top 0.254: v23.95,36.2 24.27,35.88 v24.27,28.89
  Bottom 0.254: IC6.12 16.65,35.88 23.63,35.88 v23.95,36.2 | v24.27,28.89 24.59,28.58 26.81,28.58 27.13,28.26 34.43,28.26 34.75,28.58 38.24,28.58 38.87,27.94 41.1,27.94 43.64,25.4 43.64,24.13 44.27,23.49 48.08,23.49 51.57,26.99 60.46,26.99 61.1,27.62 65.86,27.62 67.77,29.53 67.77,30.16 68.4,30.8 77.29,30.8 77.93,30.16 77.93,29.21 78.56,28.58 79.83,28.58 80.47,29.21 80.47,30.48 81.1,31.11 89.99,31.11 90.63,30.48 D1.A D2.A
GND  (via drill 0.6)
  Top 0.61: X1.1 IC10.1
  other vias: 38.56,42.55 22.36,29.53 28.08,13.34 32.21,42.86 40.46,28.89 30.94,27.3 43.64,33.66 88.72,9.21 8.08,17.46 5.85,14.61 13.16,32.38 6.49,33.97 10.3,42.55 13.16,13.65 13.16,37.78 23.63,41.27 24.27,43.5 15.7,13.65 99.2,39.69 84.91,43.18 99.52,42.23 99.52,45.09 91.9,42.86 9.35,13.65 8.08,10.48 2.36,21.27 33.16,46.35 16.01,47.62 2.36,40 6.49,39.05 9.98,45.09 13.16,42.55 88.72,4.76 80.47,7.3 88.72,13.65 83.32,7.3 77.29,7.3 84.33,14.9 81.42,39.69 47.76,47.62 103.64,38.42 91.9,54.61 72.85,51.43 103.64,42.23 58.86,54.51 103.64,45.72 88.09,54.61 42.31,51.55 76.66,37.46 81.74,27.3 76.66,25.72 37.29,24.76 35.7,24.76 12.84,26.99 50.36,1.44 37.92,26.99 18.24,23.81 13.16,17.78 33.48,27.3 95.07,42.55 56.21,54.55 45.54,42.23 37.92,34.92 57.61,18.41 60.46,20 49.35,30.8 44.59,16.83 44.91,9.84 50.88,51.49 73.16,41.91 40.14,3.17 6.49,44.13 20.46,47.62 46.75,51.55 2.36,44.13 103.33,51.75 48.72,26.04 17.92,49.53 92.21,40.32 2.36,25.4 34.75,3.17 29.67,3.17 24.59,3.17 19.51,3.17 3.31,3.49 1.73,4.76 86.41,6.13 62.69,0.95 67.77,0.95 72.85,0.95 77.93,0.95 83.01,0.95 88.72,0.95 65.23,24.13 14.05,51.55 23.58,51.55 28.34,51.55 18.81,51.55 33.1,51.55 37.86,51.55 9.92,51.55 63.64,52.39 71.58,52.39 67.77,52.39 73.8,26.67 71.58,26.67 67.77,36.51 91.58,46.35 89.67,46.35 5.16,51.55 43,23.49
  pour Bottom: 0,52.7 0,2.22 47.13,2.22 49.35,0 89.99,0 89.99,25.4 105.37,25.4 105.37,54.29 94.44,54.29 92.85,55.88 55.07,55.88 51.89,52.71 47.77,52.71 47.84,52.7
  pour Top: 0,52.7 47.83,52.7 47.77,52.71 51.89,52.71 55.07,55.88 92.85,55.88 94.44,54.29 105.37,54.29 105.37,25.4 89.99,25.4 89.99,0 49.35,0 47.13,2.22 0,2.22
  cutout Top: 16.33,2.22 arc90 5.22,0 7.44,2.22
  cutout Bottom: 16.33,2.22 arc90 5.22,0 7.44,2.22
N$1
  Bottom 0.254: R4.2 R3.1
N$2  (via drill 0.6)
  Top 0.254: 90.63,51.43 90.31,51.75 | 90.31,51.75 C2.2 88.09,51.43 | IC2.14 91.9,38.74 90.63,40 90.63,51.43 | 90.63,51.43 90.31,51.75 | IC2.6 85.55,46.35 85.55,51.43 C1.2 88.09,51.43 | 88.09,51.43 88.09,43.81 v87.45,43.18
  Bottom 0.254: J1.1 87.9,42.74 v87.45,43.18
N$3
  Top 0.254: C2.1 93.17,51.43 93.17,41.28 94.44,40 IC2.15
  Bottom 0.254: R4.1 C2.1
N$4
  Top 0.254: IC2.7 83.01,46.35 83.01,51.43 C1.1
  Bottom 0.254: C1.1 R2.1
N$5
  Bottom 0.254: R2.2 R1.1
N$6
  Bottom 0.254: IC2.4 87.77,46.67 66.81,46.67 66.18,46.04 64.91,46.04 IC3.12
N$7
  Top 0.254: R7.2 3,45.72 T1.2
N$8  (via drill 0.6)
  Top 0.254: v82.69,43.18 82.69,41.59 85.23,39.05 IC2.12
  Bottom 0.254: IC3.13 61.73,44.77 63,43.5 68.72,43.5 69.35,44.13 77.29,44.13 77.61,43.81 78.24,43.18 80.47,43.18 82.37,43.18 v82.69,43.18
N$9
  Bottom 0.254: J2.2 34.75,39.69 35.7,38.74 38.56,38.74 39.19,38.74 39.83,39.37 41.41,39.37 42.05,40 43.95,40 50.62,40 50.94,40 52.53,40 53.8,38.74 56.02,38.74 57.29,38.74 57.61,38.74 58.56,38.74 58.88,38.42 68.08,38.42 IC3.5
N$10
  Top 0.254: T2.2 4.27,42.86 5.54,44.13 R6.1
N$11
  Bottom 0.254: IC3.3 IC3.4
N$12  (via drill 0.6)
  Top 0.254: v40.14,43.5 40.78,42.86 40.78,38.1 v40.46,37.78
  Bottom 0.254: IC4.8 29.35,43.5 29.67,43.81 35.06,43.81 35.38,44.13 39.51,44.13 v40.14,43.5 | IC3.1 58.24,38.1 57.92,38.1 49.03,38.1 48.4,38.74 42.68,38.74 41.73,37.78 v40.46,37.78
N$13
  Bottom 0.254: T2.1 1.73,36.2 1.73,29.21 3.63,27.31 JP4.1
N$14
  Bottom 0.254: R9.2 4.27,31.11 4.27,33.34 5.54,34.61 T2.3
N$21
  Top 0.254: JP4.3 3.95,23.81 3.95,28.58 4.27,28.89 4.27,30.48 5.54,31.75 R8.2
N$22
  Bottom 0.254: R8.1 3,35.88 4.27,37.15 4.27,41.28 T1.3
NC0
  Top 0.254: IC10.5 X1.5
NC1
  Top 0.254: X1.35 IC10.35
NC2
  Top 0.254: X1.36 IC10.36
ON-OFF
  Top 0.254: RN1.6 81.74,20.32 80.78,21.27 80.78,28.26 81.74,29.21 IC1.13
  Bottom 0.254: IC1.13 JP1.1
OPT2  (via drill 0.6)
  Top 0.254: RN1.5 IC1.11 v79.2,26.04
  Bottom 0.254: v79.2,26.04 82.05,26.04 83.32,27.31 JP1.3
OPT3
  Top 0.254: IC1.10 RN1.4
  Bottom 0.254: IC1.10 77.93,23.49 79.2,23.49 80.47,24.76 JP1.5
OPT4
  Top 0.254: IC1.9 RN1.3
  Bottom 0.254: IC1.9 74.12,21.91 74.75,21.27 84.59,21.27 JP1.7
OPT5
  Top 0.254: RN1.2 IC1.8
  Bottom 0.152: J4.2 86.6,9.06 87.67,10.12 87.67,16.07 88.28,16.68 88.28,17.59 87.36,18.5 86.73,18.5 JP1.9
  Bottom 0.254: RN1.2 72.53,20.64 84.59,20.64 JP1.9
PHI1  (via drill 0.6)
  Top 0.254: IC10.3 X1.3 | v23,47.63 20.78,45.4 v20.78,39.37 21.41,38.74 21.41,28.58 22.05,27.94 22.05,19.05 24.27,16.83 24.27,13.65 25.86,12.06 IC7.7
  Bottom 0.254: v20.78,39.37 20.46,39.05 16.65,39.05 IC6.14 | X1.3 95.71,48.89 63.64,48.89 62.69,49.85 62.69,50.48 62.05,51.12 53.16,51.12 51.89,49.85 25.86,49.85 23.63,47.63 v23,47.63
PHI2
  Top 0.254: IC10.39 X1.39
  Bottom 0.254: IC10.39 98.56,31.43 97.93,31.43 96.98,30.48 96.98,28.26 D2.C
PHI2-IN  (via drill 0.6)
  Bottom 0.254: IC3.11 67.45,46.04 87.45,46.04 88.09,45.4 88.09,44.45 91.26,41.28 v98.25,41.28 100.79,41.28 102.06,40 102.06,37.46 103.64,35.88 103.64,31.75 101.74,29.85 JP3.4
PHI2-IN_OUT
  Top 0.254: IC10.37 95.71,31.11 97.29,31.11 JP3.2
PHI2-INPUT
  Top 0.254: X1.37 93.17,33.66 93.17,28.89 93.8,28.26 97.61,28.26 JP3.1
PHI2-INPUT_OUT  (via drill 0.6)
  Top 0.254: IC2.1 v96.98,39.37 97.93,39.37 98.88,38.42 98.88,37.46 100.79,35.56 100.79,32.07 102.37,30.48 102.37,28.58 JP3.3
  Bottom 0.254: IC2.10 83.64,39.37 v96.98,39.37
PRE  (via drill 0.6)
  Top 0.254: v30.62,42.55 32.21,40.96 32.21,36.83 34.11,34.92 IC4.4
  Bottom 0.254: J3.3 v30.62,42.55
PULLUP
  Top 0.254: R12.1 43.64,26.04 46.18,26.04 JP2.12
Q  (via drill 0.6)
  Top 0.254: v33.79,36.83 35.38,36.83 IC4.5
  Bottom 0.254: J2.1 v33.79,36.83
R/W  (via drill 0.6)
  Top 0.254: X1.34 IC10.34 86.82,29.21 86.18,28.58 v84.28,28.58 | v13.47,22.86 12.52,22.86 11.89,23.49 11.89,25.72 10.93,26.67 10.93,33.66 11.57,34.29 11.57,35.56 10.62,36.51 v10.62,39.69 | v23.63,22.86 26.17,22.86 v26.81,22.22
  Bottom 0.254: v23.63,22.86 23.32,22.54 13.79,22.54 v13.47,22.86 | v26.81,22.22 27.44,22.86 28.71,22.86 30.3,21.27 41.1,21.27 43.32,19.05 49.03,19.05 51.89,21.91 51.89,23.49 52.84,24.45 62.69,24.45 63.96,25.72 66.81,25.72 68.72,27.62 80.15,27.62 81.1,28.58 v84.28,28.58 | v10.62,39.69 12.84,39.69 IC6.15
R/W-RAM  (via drill 0.6)
  Top 0.252: 51.89,29.85 51.89,18.39 v50.98,17.48
  Top 0.254: v49.35,39.05 49.03,38.74 49.03,32.7 51.89,29.85 | IC6.13 14.11,39.05 14.11,48.58 R5.1
  Bottom 0.252: 55.38,18.1 51.6,18.1 v50.98,17.48
  Bottom 0.254: IC6.13 16.65,38.42 21.41,38.42 21.73,38.74 23.63,38.74 24.27,38.1 24.27,37.46 25.22,36.51 29.35,36.51 29.98,35.88 32.21,35.88 32.84,35.24 34.75,35.24 35.38,35.88 39.19,35.88 39.51,36.2 39.51,38.1 40.14,38.74 41.73,38.74 42.37,39.37 49.03,39.37 v49.35,39.05 | IC9.27 55.38,18.1
RAM-/CS1
  Top 0.254: IC9.20 75.07,18.1 75.07,22.86 75.07,28.26 74.12,29.21 IC1.16
  Bottom 0.254: IC9.22 69.99,18.1 73.16,18.1 IC9.20
RDY
  Top 0.254: IC10.2 X1.2
ROM-/CE  (via drill 0.6)
  Top 0.254: IC1.18 v69.04,26.67
  Bottom 0.254: v69.04,26.67 68.4,26.04 67.45,25.08 64.27,25.08 63,23.81 | 63,23.81 62.69,23.81 | 62.69,23.81 63,23.81 | 63,23.81 62.69,23.81 | 62.69,23.81 61.1,23.81 60.46,23.81 53.16,23.81 52.84,23.49 52.53,23.18 52.53,21.59 50.3,19.37 49.35,18.42 43,18.42 42.05,19.37 40.78,20.64 33.16,20.64 31.57,20.64 31.25,20.64 30.94,20.64 28.08,20.64 26.81,20.64 IC8.20 24.9,18.73 21.73,18.73 IC8.22
SELECT-A[0..3|4..7]->AL
  Bottom 0.254: IC5.1 26.81,26.35 34.75,26.35 35.38,25.72 39.51,25.72 44.27,20.95 48.08,20.95 48.72,21.59 48.72,23.18 51.89,26.35 60.78,26.35 61.42,26.99 66.18,26.99 68.08,28.89 70.62,28.89 IC1.17
SET-CLOCK-MODE  (via drill 0.6)
  Top 0.254: v30.62,32.7 v31.89,33.97
  Bottom 0.254: IC6.11 16.65,31.43 23.32,31.43 25.22,33.34 29.98,33.34 30.3,33.02 v30.62,32.7 30.94,32.38 35.06,32.38 35.7,32.38 IC4.3 36.65,32.38 38.24,32.38 R11.2 | IC4.11 28.71,34.61 31.25,34.61 v31.89,33.97
SOB
  Top 0.254: X1.38 IC10.38
SYNC
  Top 0.254: X1.7 IC10.7
VCC  (via drill 0.6)
  Top 0.61: X1.8 IC10.8 | IC8.28 5.54,17.14 | 5.54,17.14 6.81,15.87 IC7.16 | R1.2 73.48,53.34 54.69,53.34 51.24,49.9 48.2,49.9 48.11,49.82 | 55.07,15.87 57.61,15.87 IC9.26 | R3.2 100.79,51.43 v100.79,43.5 v100.79,37.46 102.69,37.46 103.64,36.51 C11.1 | IC4.10 29.67,36.2 29.67,28.58 IC4.14 v28.4,25.08 | v11.89,28.58 11.89,33.66 12.2,33.97 12.2,35.88 11.89,36.2 v11.89,41.28 v11.89,45.09 C3.+ 9.98,49.53 R10.1 | C8.1 5.54,17.14 | 48.11,49.82 47.45,50.48 23.95,50.48 23.32,49.85 R5.2 20.46,49.85 IC6.16 | 48.11,49.82 49.35,48.58 49.35,46.99 C10.1 51.26,37.46 52.53,36.2 52.53,33.66 C7.1 IC1.24 53.8,25.08 55.07,23.81 55.07,20.95 C9.1 IC9.28 55.07,15.87 | v38.87,23.49 38.87,25.08 42.37,28.58 R12.2 | 55.07,15.87 55.07,3.17 IC9.1
  Bottom 0.254: 10.62,28.58 6.81,28.58 R9.1
  Bottom 0.61: R1.2 75.39,51.43 84.28,51.43 | 84.28,51.43 X1.8 | IC2.3 IC2.2 96.02,43.5 v100.79,43.5 | IC2.11 85.55,36.2 95.71,36.2 IC2.16 v100.79,37.46 | 84.28,51.43 100.79,51.43 R3.2 | IC8.28 C6.1 10.62,28.58 v11.89,28.58 16.97,28.58 IC5.16 C5.1 22.36,26.35 24.27,26.35 25.54,25.08 v28.4,25.08 30.62,25.08 C4.1 32.21,23.49 v38.87,23.49 | C10.1 IC3.14 | RN1.1 67.77,18.42 60.15,18.42 IC9.26 | v11.89,45.09 IC6.16 | T1.1 6.81,41.28 v11.89,41.28

## Text on the board
tPlace: 1 | 2 | 3 | 4 | 1541 | 1571 | 5 | JP2 | JP3
bPlace: Professional Dos V 1.42 2026 | Set according / to ROMset used | Additional / GND | L2 | L1 | close if Dolphin DOS / is installed
tNames: Reversed by WoMo / Improved by Tommi_nrw / Layout by shock__ | JP1 options (jumpers set): / 1 ProfDOS enabled / 2 don't replace $0000 RAM / 3 don't replace $C000 ROM / 4 replace $E000 ROM / 5 1571 mode (set JP2/JP3) | Professional DOS 2016 | $0000-$1FFF / Low ROM / $2000-$3FFF / High ROM / $4000-$7FFF / ProfDOS | First GAL-Version by Benutzername / Also thanks to Unseen / & GMP, KiWi, marty, Syken
bNames: No more Schneckenkarussell!